# Allegro board TEA2025.brd
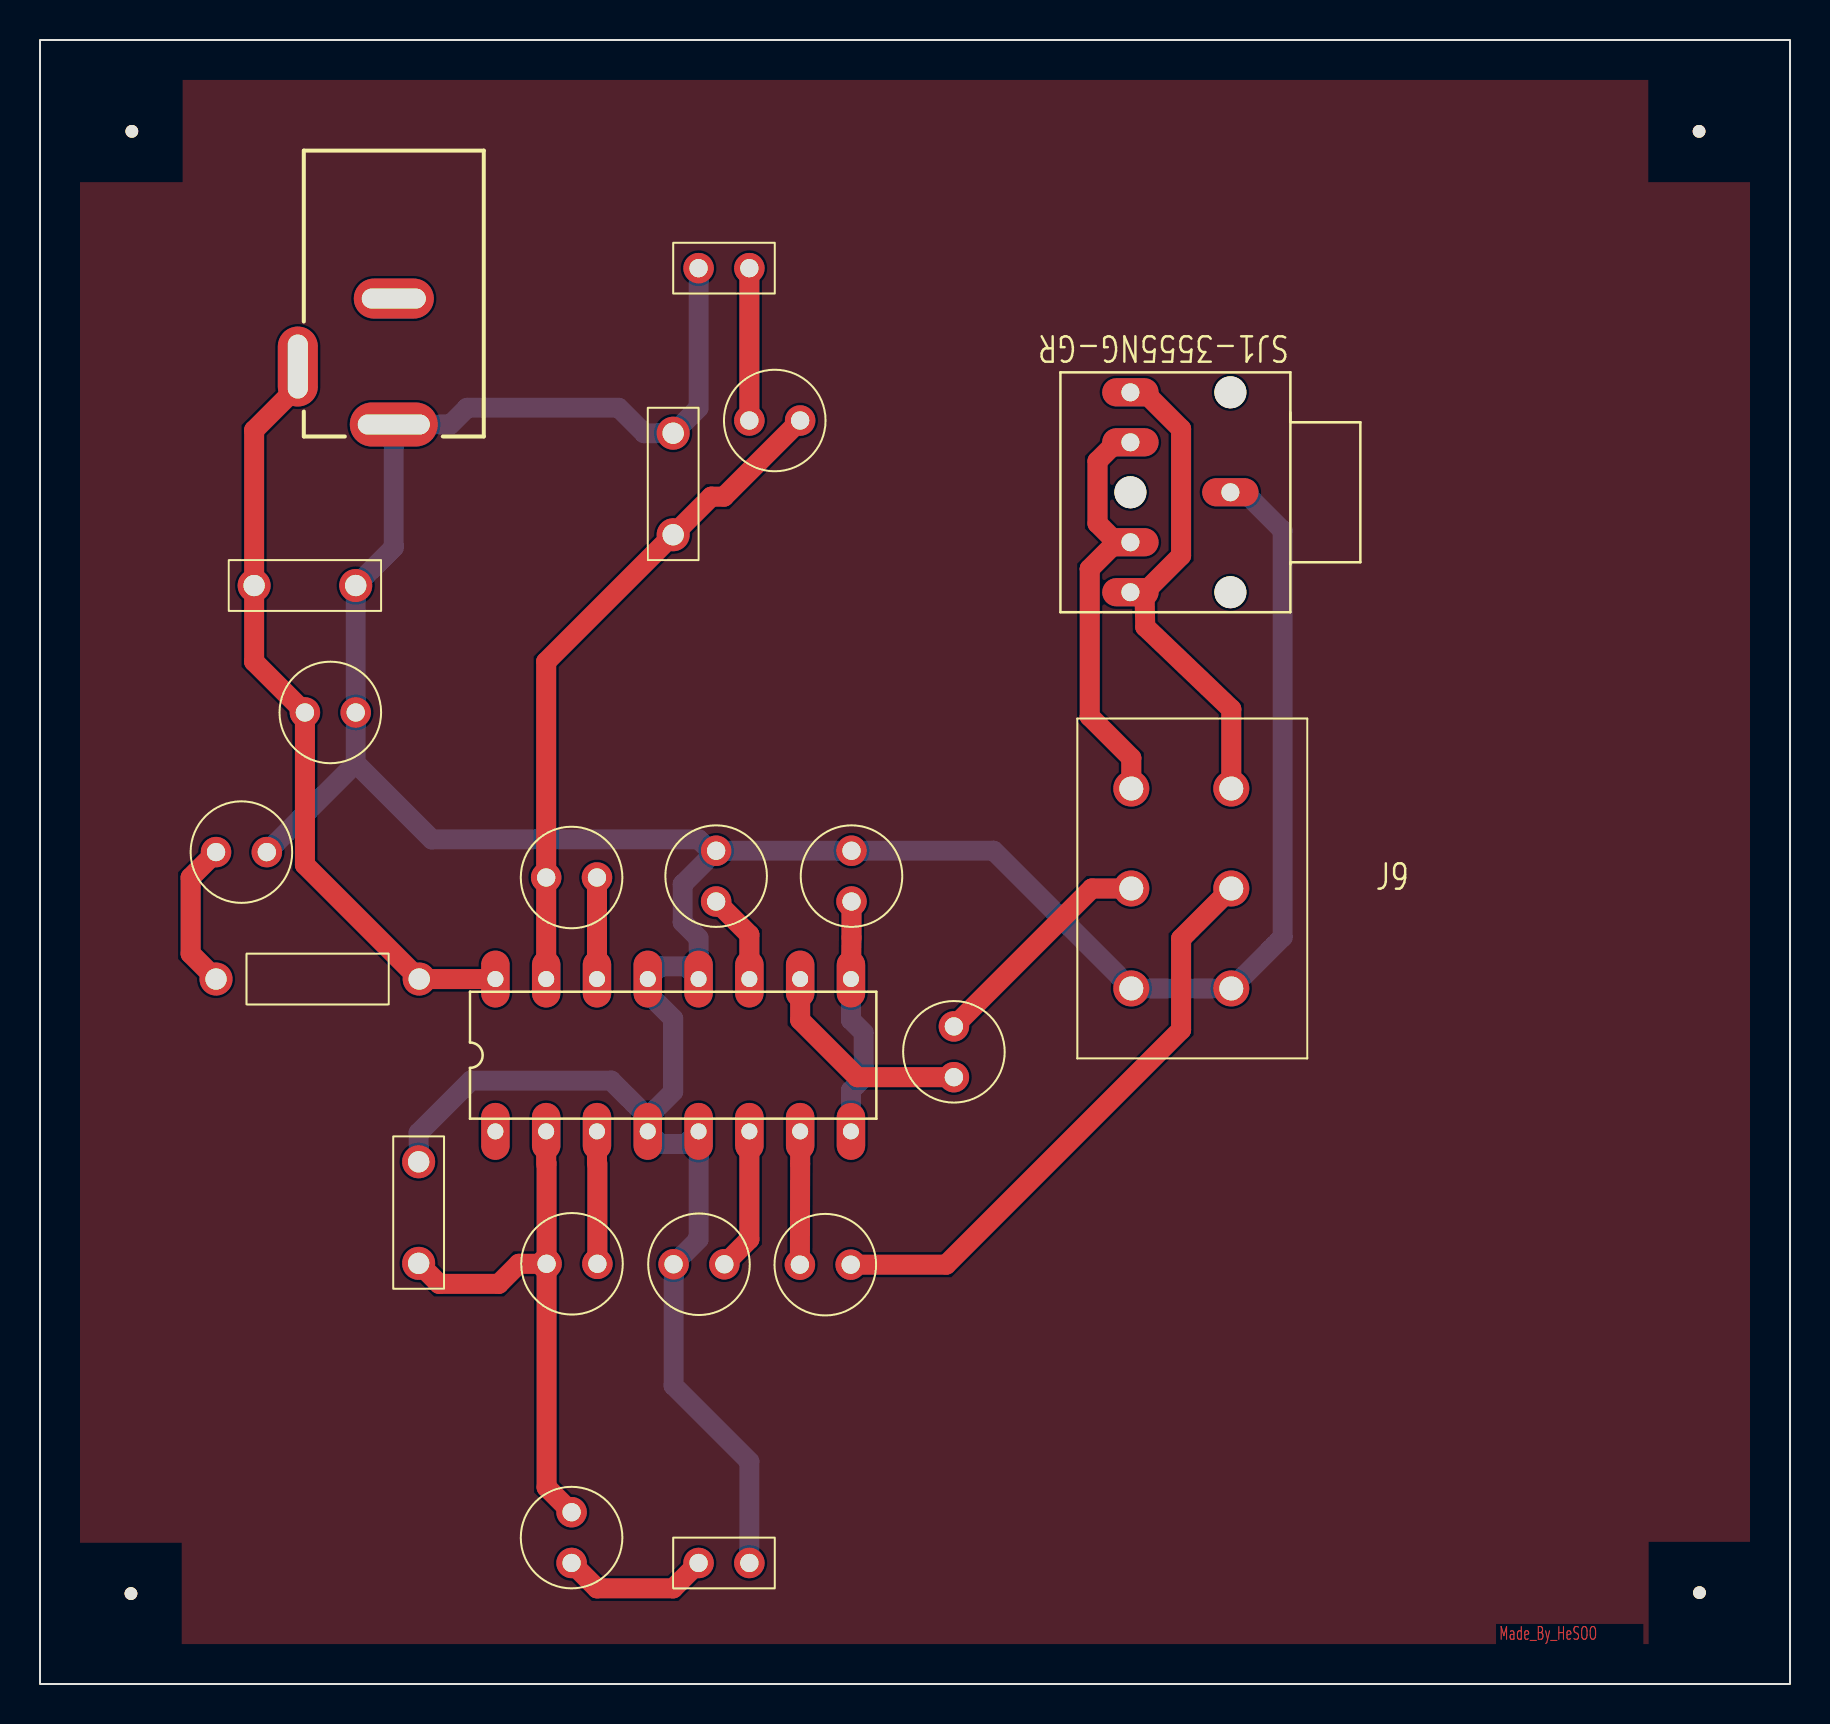
[diagram p0: board, top side]
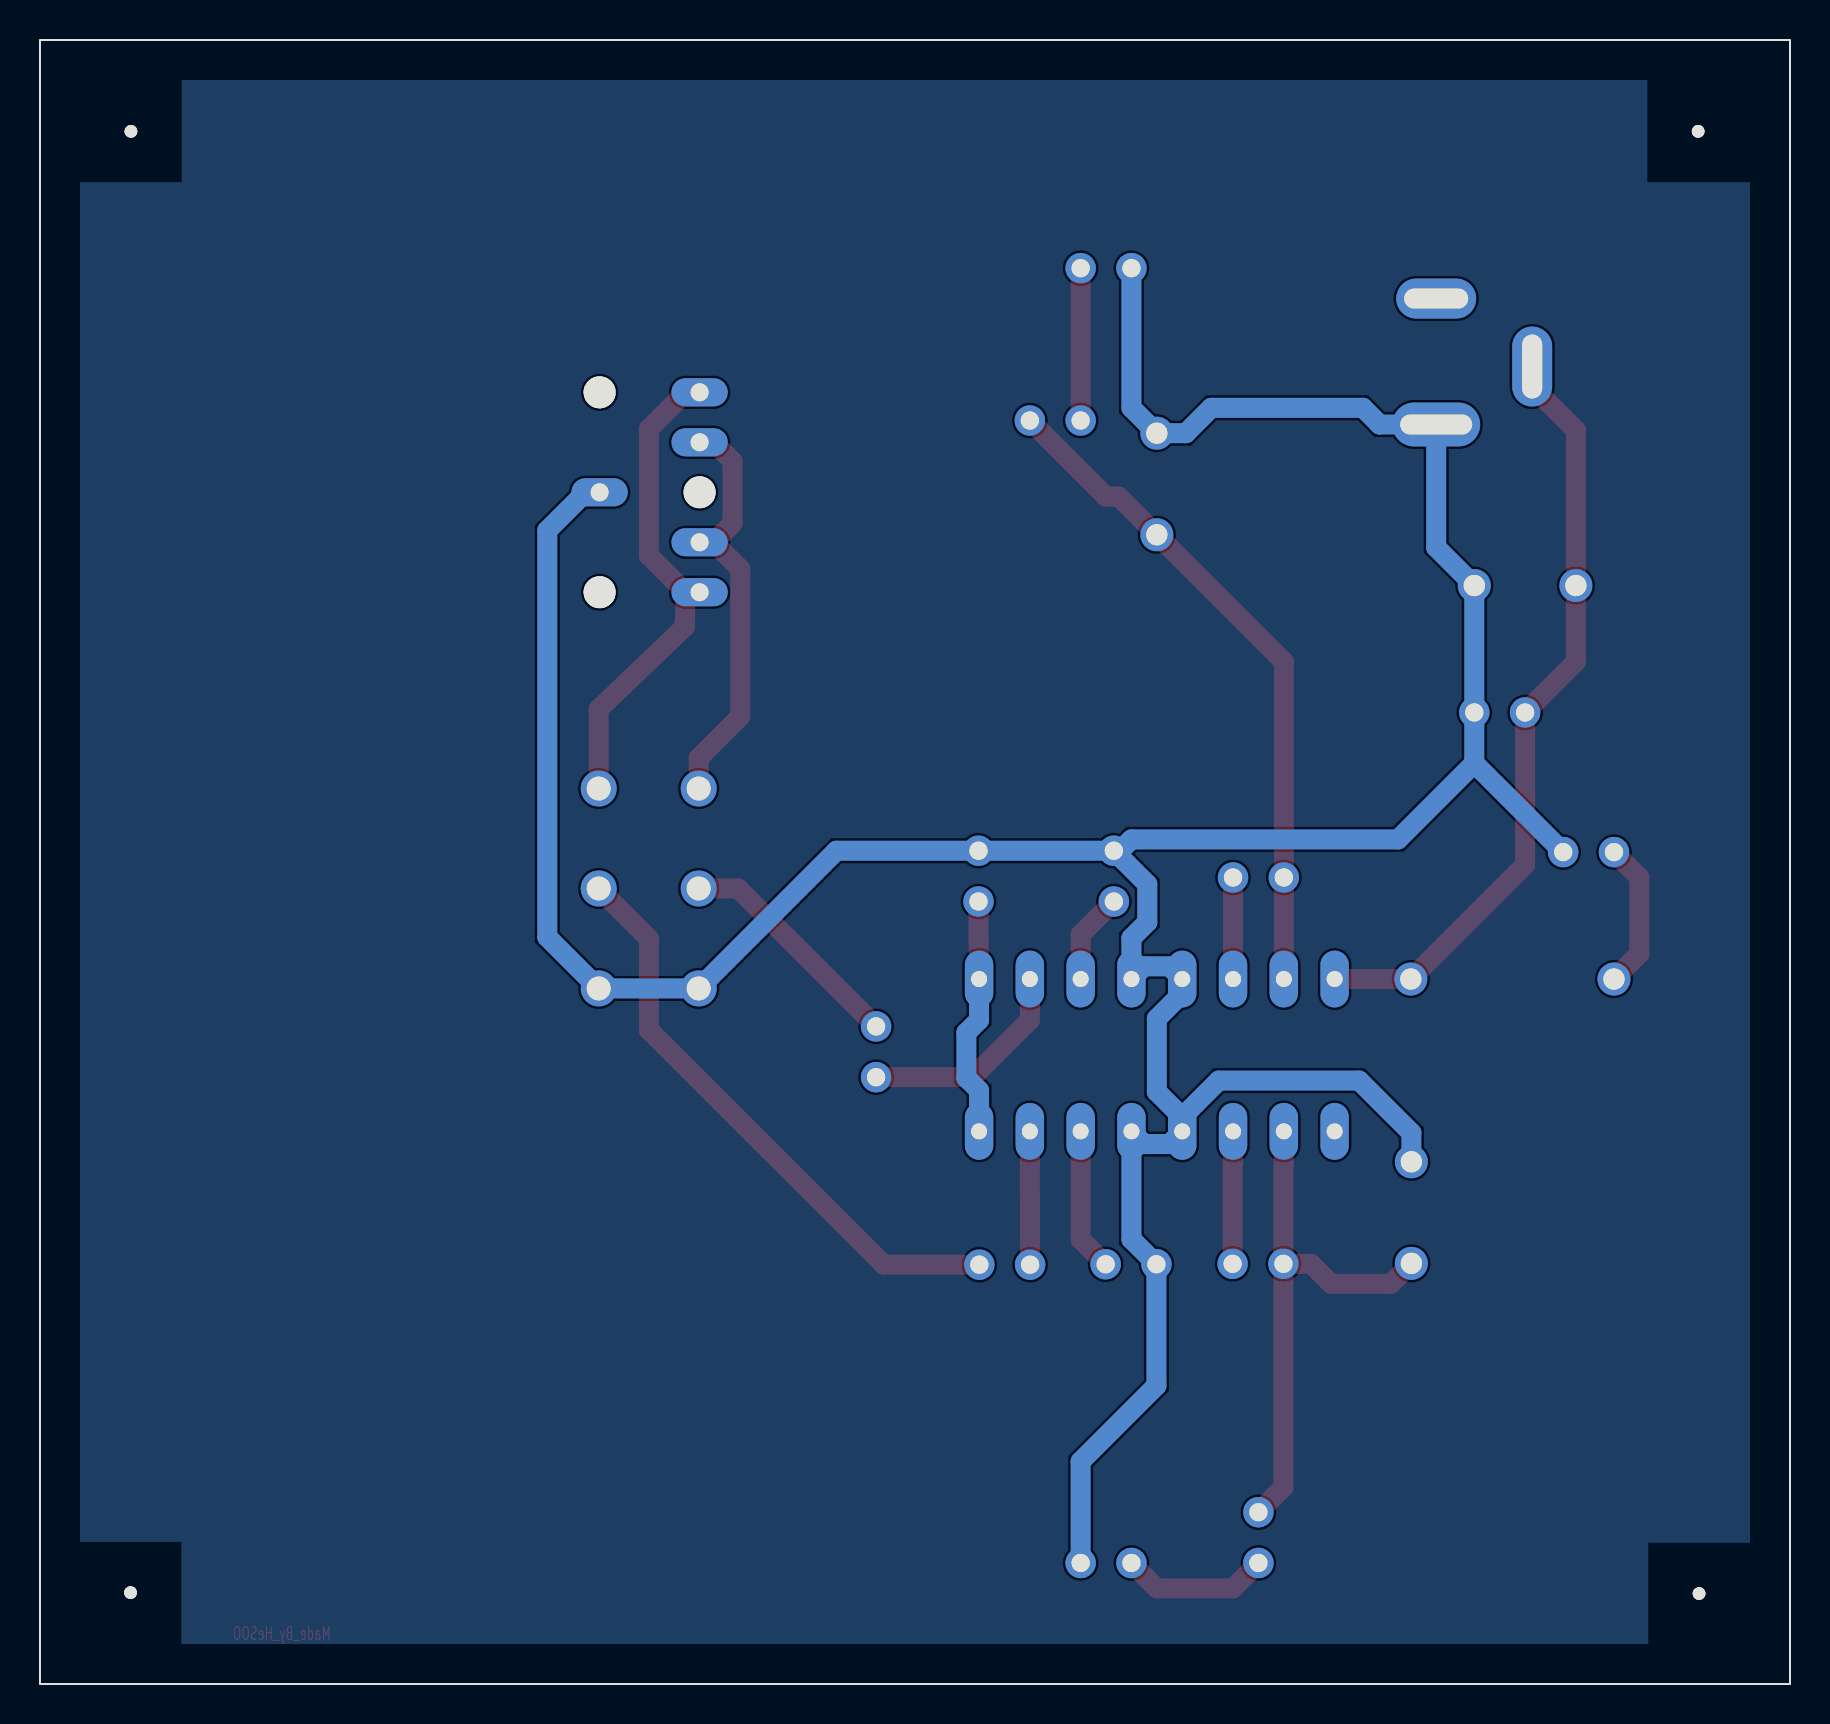
[diagram p1: board, bottom side, seen from below]

Outline 87.51 x 82.24 mm; copper layers: TOP, BOTTOM. Coordinates in mm from the lower left corner of the outline.
Outline path: rectangle 0,0 87.51,82.24

## Placement (name value [footprint] x y rotation side)
C1  0.1uF  [CAPCK06]  10.71 54.95 270 top
C2  470uF  [CAP196]  13.25 48.6 270 top
C3  100uF  [CAP196]  33.81 39.14 0 top
C4  100uF  [CAP196]  27.85 40.35 90 top
C5  470uF  [CAP196]  38.01 63.21 90 top
C6  0.15uF  [CAPCK06]  31.66 57.49 0 top
C7  100uF  [CAP196]  40.58 39.14 0 top
C8  470uF  [CAP196]  26.58 8.6 180 top
C9  100uF  [CAP196]  27.87 21.02 90 top
C10  0.15uF  [CAPCK06]  18.93 21.04 0 top
C11  100uF  [CAP196]  34.22 21 90 top
C12  10uF  [CAP196]  38 20.98 270 top
C13  10uF  [CAP196]  45.7 30.36 0 top
D1  LED  [CAP196]  11.34 41.62 90 top
J1  CONN JACK PWR  [GCT_DCJ200-10-A-XX-K_REVA]  17.69 69.56 180 top
J2  CON2  [JUMPER2]  35.47 70.82 180 top
J7  CON2  [JUMPER2]  32.93 6.06 0 top
J8  S_J  [CUI_SJ1-3555NG-GR]  59.53 59.62 180 top
J9  V_R  [PDB182K220K102B]  59.57 34.8 0 top
NOREF  -  [unnamed]  4.55 4.53 0 top
NOREF#2  -  [unnamed]  4.59 77.67 0 top
NOREF#3  -  [unnamed]  82.99 4.57 0 top
NOREF#4  -  [unnamed]  82.97 77.67 0 top
R1  470  [RES400]  18.96 35.27 90 top
U1  TEA2025  [DIL16]  31.66 31.46 90 top

## Library data of the parts
C1 C6 C10 = CAPACITOR NON-POL: Tolerance: ***; User Part Number: ***
C2-C5 C7-C9 C11-C13 = C: Tolerance: ***; User Part Number: ***
D1 = LED: Tolerance: ***; User Part Number: ***
J1 = CONN JACK PWR
J2 J7 = CON2: User Part Number: ***
J8 = S_J
J9 = V_R
R1 = R: Tolerance: ***; User Part Number: ***
U1 = TEA2025_0

## Footprints (pads in the part's own frame, mm; a bottom-side part is the same pattern mirrored in y, then rotated)
CAP196
  round 1.524 hole 0.914: 1(0,0) 2(0,2.54)
CAPCK06
  round 1.651 hole 1.067: 1(0,0) 2(0,5.08)
CUI_SJ1-3555NG-GR
  round 1.6 hole 1.6 unplated: (0,5) (0,-5) (5,0)
  oval 2.816x1.408 hole 0.9: 1(0,0) 2(5,-5) 3(5,5) 4(5,-2.5) 5(5,2.5)
DIL16
  oval 2.845x1.422 hole 0.8: 1(-3.81,8.89) 2(-3.81,6.35) 3(-3.81,3.81) 4(-3.81,1.27) 5(-3.81,-1.27) 6(-3.81,-3.81) 7(-3.81,-6.35) 8(-3.81,-8.89) 9(3.81,-8.89) 10(3.81,-6.35) 11(3.81,-3.81) 12(3.81,-1.27) 13(3.81,1.27) 14(3.81,3.81) 15(3.81,6.35) 16(3.81,8.89)
GCT_DCJ200-10-A-XX-K_REVA
  oval 4.4x2.2 hole 3.6x1: 1(0,6.55)
  oval 4x2 hole 3.2x1: 2(0,0.25)
  oval 2x4 hole 1x3.2: 3(4.8,3.65)
JUMPER2
  round 1.524 hole 0.914: 1(0,0) 2(2.54,0)
PDB182K220K102B
  round 1.8 hole 1.2: 1(0,0) 2(0,5) 3(0,10) 4(-5,0) 5(-5,5) 6(-5,10)
RES400
  round 1.651 hole 1.067: 1(0,0) 2(0,10.16)
unnamed
  round 0.635 hole 3.175 unplated: (0,0)

## Nets
VCC: C1.1 C2.1 J1.3 R1.1 U1.16(+VS)
0: C1.2 C2.2 C3.2 C6.2 C7.2 C10.2 C11.2 D1.1(CATHODE) J1.1 J2.2 J7.2 J8.1 J9.1 J9.4 U1.4(GND1) U1.5(GND2) U1.12(GND3) U1.13(GND4)
N00764: C4.2 C5.1 C6.1 U1.15(OUT.1)
N00772: C4.1 U1.14(BOOT.1)
N000901: D1.2(ANODE) R1.2
N00939: C3.1 U1.11(FEEDBACK2)
N01375: C5.2 J2.1
N01444: C8.2 J7.1
N01522: C8.1 C9.2 C10.1 U1.2(OUT.2)
N01529: C9.1 U1.3(BOOT.2)
N01638: C11.1 U1.6(FEEDBACK1)
N01682: C12.1 U1.7(IN.2(+))
N01689: C7.1 U1.8(SVR) U1.9(GND(SUB.))
N01916: C13.1 U1.10(IN.1(+))
N02284: J8.4 J8.5 J9.6
N02288: J8.2 J8.3 J9.3
N02543: C12.2 J9.2
N02593: C13.2 J9.5

Pads without a net: J1 2; U1 1

## Routing (per net, layer and track width the routed paths; a pad name or vN(x,y) marks a point on that pad's centre or on a via; arc(x,y) is an arc through that point)
VCC: length 38.8
  TOP w1: U1.16 R1.1 13.25,40.98 C2.1 10.71,51.14 C1.1 10.71,62.72 12.89,64.91 J1.3
0: length 184.1
  BOTTOM w1: 33.66,41.53 32.94,42.25 19.6,42.25 15.79,46.06 ; 33.66,41.53 C3.2 C7.2 47.68,41.68 J9.4 J9.1 62.14,37.37 62.14,57.7 60.23,59.62 J8.1 ; 33.66,41.53 32.14,40.01 32.14,38.11 32.93,37.31 U1.12 32.3,35.9 31.03,35.9 U1.13 30.39,34.55 31.66,33.28 31.66,29.63 30.39,28.36 ; D1.1 15.79,46.06 ; 15.79,46.06 C2.2 C1.2 17.69,56.86 J1.1 20.52,63.01 21.35,63.84 28.94,63.84 30.21,62.57 C6.2 32.93,63.84 J2.2 ; 30.39,28.36 U1.4 31.03,27.01 32.3,27.01 U1.5 32.93,22.25 C11.2 31.68,14.92 35.47,11.13 J7.2 ; 30.39,28.36 28.56,30.19 21.54,30.19 18.93,27.58 C10.2
N00764: length 33.6
  TOP w1: U1.15 C4.2 25.31,51.14 C6.1 33.57,59.4 34.2,59.4 C5.1
N00772: length 5.1
  TOP w1: U1.14 C4.1
N000901: length 7.4
  TOP w1: D1.2 7.53,40.35 7.53,36.54 R1.2
N00939: length 4.6
  TOP w1: U1.11 35.47,37.48 C3.1
N01375: length 7.6
  TOP w1: J2.1 C5.2
N01444: length 7.4
  TOP w1: J7.1 31.66,4.79 27.85,4.79 C8.2
N01522: length 26.8
  TOP w0.127: 25.33,26.03 25.31,26.03
  TOP w1: C9.2 25.33,26.03 ; C9.2 25.33,9.84 C8.1 ; C9.2 23.94,21.02 22.94,20.02 19.96,20.02 C10.1 ; 25.31,26.03 U1.2
N01529: length 6.6
  TOP w0.127: 27.85,26.03 27.87,26.03
  TOP w1: 27.87,26.03 C9.1 ; U1.3 27.85,26.03
N01638: length 7.2
  TOP w1: C11.1 35.47,22.25 U1.6
N01682: length 6.7
  TOP w1: U1.7 38.01,26.03 C12.1
N01689: length 12
  TOP w1: U1.9 40.58,37.34 C7.1
  BOTTOM w1: U1.9 40.55,33.22 41.19,32.58 41.19,30.33 40.55,29.69 U1.8
N01916: length 10.9
  TOP w1: U1.10 38.01,33.22 40.87,30.36 C13.1
N02284: length 20.9
  TOP w1: J8.5 53.82,57.11 ; 53.82,57.11 52.49,55.78 52.49,48.4 54.57,46.32 J9.6 ; 53.82,57.11 52.88,58.06 52.88,61.17 53.82,62.12 J8.4
N02288: length 24.6
  TOP w1: 55.23,54.62 57.06,56.45 57.06,62.78 55.23,64.62 J8.2 ; 55.23,54.62 J8.3 ; 55.23,54.62 55.27,52.88 59.57,48.77 J9.3
N02543: length 29.5
  TOP w1: J9.2 57.06,37.29 57.06,32.73 45.31,20.98 C12.2
N02593: length 11.7
  TOP w1: C13.2 52.6,39.8 J9.5

## Copper pours and planes (outline as drawn; the poured copper is in the pictures)
Net_1 on BOTTOM: 2,2 2,80.24 85.51,80.24 85.51,2
Net_2 on TOP: 2,2 2,80.24 85.51,80.24 85.51,2

## Text on the board
TOP: Made_By_HeSOO
